# EAGLE board SchematSterownika (EAGLE 6.1)

Size 149.84 x 138.1 mm. Coordinates in mm from the lower left corner, seen from the top.
Outline: 0,0 149.84,0 149.84,138.1 0,138.1 0,0
Copper layers (1*16): Top 0.035mm / dielectric 1.5mm / Bottom 0.035mm
Design rules: minimum track width 14mil, minimum drill 24mil, track to track 8mil, track to pad 8mil, pad to pad 8mil, via to via 8mil, smd to smd 8mil, copper to edge 40mil, drill to drill 8mil, minimum pad ring 10mil, minimum via ring 8mil, stop-mask expansion 4mil, vias tented up to drill 0mil, thermal gap 10mil

## Footprints (pad centres in the part's own frame; a part is rotated, then mirrored left to right if it is on the bottom)
C050-050X075 = drill 0.813 octagon: 1 -2.54,0; 2 2.54,0
TUXGR_16X2_R2 = drill 1 pad 1.676: 1 -32,15.5; 2 -29.46,15.5; 3 -26.92,15.5; 4 -24.38,15.5; 5 -21.84,15.5; 6 -19.3,15.5; 7 -16.76,15.5; 8 -14.22,15.5; 9 -11.68,15.5; 10 -9.14,15.5; 11 -6.6,15.5; 12 -4.06,15.5; 13 -1.52,15.5; 14 1.02,15.5; 15 3.56,15.5; 16 6.1,15.5 | hole 2.5: -37.5,-15.5; 37.5,-15.5; -37.5,15.5; 37.5,15.5
DIL40 = drill 0.813 long: 1 -24.13,-7.62; 2 -21.59,-7.62; 3 -19.05,-7.62; 4 -16.51,-7.62; 5 -13.97,-7.62; 6 -11.43,-7.62; 7 -8.89,-7.62; 8 -6.35,-7.62; 9 -3.81,-7.62; 10 -1.27,-7.62; 11 1.27,-7.62; 12 3.81,-7.62; 13 6.35,-7.62; 14 8.89,-7.62; 15 11.43,-7.62; 16 13.97,-7.62; 17 16.51,-7.62; 18 19.05,-7.62; 19 21.59,-7.62; 20 24.13,-7.62; 21 24.13,7.62; 22 21.59,7.62; 23 19.05,7.62; 24 16.51,7.62; 25 13.97,7.62; 26 11.43,7.62; 27 8.89,7.62; 28 6.35,7.62; 29 3.81,7.62; 30 1.27,7.62; 31 -1.27,7.62; 32 -3.81,7.62; 33 -6.35,7.62; 34 -8.89,7.62; 35 -11.43,7.62; 36 -13.97,7.62; 37 -16.51,7.62; 38 -19.05,7.62; 39 -21.59,7.62; 40 -24.13,7.62
DIL16 = drill 0.813 long: 1 -8.89,-3.81; 2 -6.35,-3.81; 3 -3.81,-3.81; 4 -1.27,-3.81; 5 1.27,-3.81; 6 3.81,-3.81; 7 6.35,-3.81; 8 8.89,-3.81; 9 8.89,3.81; 10 6.35,3.81; 11 3.81,3.81; 12 1.27,3.81; 13 -1.27,3.81; 14 -3.81,3.81; 15 -6.35,3.81; 16 -8.89,3.81
78XXS = drill 1.016 long: GND 0,-2.54; IN -2.54,-2.54; OUT 2.54,-2.54
ML10 = drill 0.914 octagon: 1 -5.08,-1.27; 2 -5.08,1.27; 3 -2.54,-1.27; 4 -2.54,1.27; 5 0,-1.27; 6 0,1.27; 7 2.54,-1.27; 8 2.54,1.27; 9 5.08,-1.27; 10 5.08,1.27
1X02 = drill 1.016 long: 1 -1.27,0; 2 1.27,0
B3F-40XX = drill 1.194 long: 1 -6.248,2.489; 2 6.248,2.489; 3 -6.248,-2.489; 4 6.248,-2.489 | hole 1.803: 0,-4.496; 0,4.496
CA9V = drill 1.321 long: A -2.54,-5.08; E 2.54,-5.08; S 0,5.08
0309/12 = drill 0.813 octagon: 1 -6.35,0; 2 6.35,0
F09HP = drill 1.016 octagon: 1 -5.486,-1.27; 2 -2.743,-1.27; 3 0,-1.27; 4 2.743,-1.27; 5 5.486,-1.27; 6 -4.115,1.27; 7 -1.372,1.27; 8 1.372,1.27; 9 4.115,1.27 | drill 3.302 pad 5.08: G1 -12.522,0; G2 12.522,0
AK500/2-H = drill 1.321 long: 1 -2.515,0; 2 2.515,0

## Placement (x,y rotation side)
C1  10uF  [C050-050X075]  90.17,95.25 0 top
C2  10uF  [C050-050X075]  100.33,95.25 0 top
C3  10uF  [C050-050X075]  110.49,95.25 0 top
C4  10uF  [C050-050X075]  90.17,83.82 0 top
C5  10uF  [C050-050X075]  100.33,83.82 0 top
C6  10uF  [C050-050X075]  110.49,83.82 0 top
DIS1  TUXGR_16X2_R2  [TUXGR_16X2_R2]  43.18,116.84 0 top
IC1  MEGA32-P  [DIL40]  38.1,86.36 0 top
IC2  MAX232  [DIL16]  124.46,88.9 270 top
IC3  [78XXS]  104.14,116.84 180 top
ISP  [ML10]  101.6,132.08 0 top
LCD_L+  JMP_LCD_1  [1X02]  138.43,119.38 0 top
LCD_L-  JMP_LCD_2  [1X02]  138.43,111.76 0 top
PA0  [B3F-40XX]  10.16,58.42 0 top
PA1  [B3F-40XX]  27.94,58.42 0 top
PA2  [B3F-40XX]  45.72,58.42 0 top
PA3  [B3F-40XX]  10.16,43.18 0 top
PA4  [B3F-40XX]  27.94,43.18 0 top
PA5  [B3F-40XX]  45.72,43.18 0 top
PA6  [B3F-40XX]  10.16,27.94 0 top
PA7  [B3F-40XX]  27.94,27.94 0 top
PB0  [B3F-40XX]  45.72,27.94 0 top
PB1  [B3F-40XX]  27.94,12.7 0 top
PB2  [B3F-40XX]  86.36,58.42 0 top
PB3  [B3F-40XX]  104.14,58.42 0 top
PB4  [B3F-40XX]  121.92,58.42 0 top
PB5  [B3F-40XX]  139.7,58.42 0 top
PB6  [B3F-40XX]  86.36,43.18 0 top
PB7  [B3F-40XX]  104.14,43.18 0 top
R1  [CA9V]  90.17,113.03 0 top
R3  10  [0309/12]  6.35,90.17 90 top
RS232  [F09HP]  138.43,86.36 270 top
S17  [B3F-40XX]  121.92,43.18 0 top
S18  [B3F-40XX]  139.7,43.18 0 top
S19  [B3F-40XX]  86.36,27.94 0 top
S20  [B3F-40XX]  104.14,27.94 0 top
S21  [B3F-40XX]  121.92,27.94 0 top
S22  [B3F-40XX]  139.7,27.94 0 top
S23  [B3F-40XX]  104.14,12.7 0 top
S24  [B3F-40XX]  121.92,12.7 0 top
SUPPLY1  SUPPLY 5V  [1X02]  118.11,119.38 0 top
SUPPLY2  SUPPLY 5V  [1X02]  128.27,119.38 0 top
SUPPLY3  SUPPLY 5V  [1X02]  118.11,111.76 0 top
SUPPLY4  SUPPLY 5V  [1X02]  128.27,111.76 0 top
SUPPLY_CON  [AK500/2-H]  133.35,133.35 0 top
SUPPLY_CON9V  [AK500/2-H]  119.38,133.35 0 top

## Library data of the parts
C1-C6 R3 = resistor
DIS1 = display-lcd; OC_FARNELL: unknown; OC_NEWARK: unknown
IC1 = atmel; MPN: ATMEGA32-16PU; OC_FARNELL: 1661729; OC_NEWARK: 51P1794
IC2 = maxim; MF: MAXIM; MPN: MAX232ACPE+; OC_FARNELL: 9723773; OC_NEWARK: 68K4544
IC3 = v-reg
ISP = con-ml; OC_FARNELL: unknown; OC_NEWARK: unknown
LCD_L+ LCD_L- SUPPLY1-SUPPLY4 = pinhead
PA0 PA1-PA7 PB0 PB1-PB7 S17-S24 = switch-omron; MF: OMRON COMPONENTS USA; MPN: B3F-4000; OC_FARNELL: 176434; OC_NEWARK: 36K3105
R1 = pot
RS232 = con-subd; OC_FARNELL: unknown; OC_NEWARK: unknown
SUPPLY_CON SUPPLY_CON9V = con-ptr500; OC_FARNELL: unknown; OC_NEWARK: unknown

## Nets
+5V: C3.2 C5.1 DIS1.2 IC2.16 IC3.OUT ISP.2 LCD_L+.2 R1.E SUPPLY1.1 SUPPLY2.1 SUPPLY3.1 SUPPLY4.1 SUPPLY_CON.1
+12V: C6.1 IC3.IN SUPPLY_CON9V.1
/+5V: IC1.10
/E: DIS1.6 IC1.17
/GND: IC1.11 IC1.31 IC2.15
/RESET: IC1.9 ISP.5
/RS: DIS1.4 IC1.16
AVCC: IC1.30
D4: DIS1.11 IC1.18
D5: DIS1.12 IC1.19
D6: DIS1.13 IC1.20
D7: DIS1.14 IC1.21
GND: C2.1 C5.2 C6.2 DIS1.1 DIS1.5 DIS1.7 DIS1.8 DIS1.9 DIS1.10 IC3.GND ISP.4 ISP.6 ISP.8 ISP.10 LCD_L-.2 PA0.3 PA1.3 PA2.3 PA3.3 PA4.3 PA5.3 PA6.3 PA7.3 PB0.3 PB1.3 PB2.3 PB3.3 PB4.3 PB5.3 PB6.3 PB7.3 R1.A RS232.5 S17.3 S18.3 S19.3 S20.3 S21.3 S22.3 S23.3 S24.3 SUPPLY1.2 SUPPLY2.2 SUPPLY3.2 SUPPLY4.2 SUPPLY_CON9V.2 SUPPLY_CON.2
N$1: IC2.13 RS232.3
N$2: RS232.4 RS232.6
N$3: RS232.7 RS232.8
N$4: IC2.14 RS232.2
N$5: C2.2 IC2.6
N$6: C3.1 IC2.2
N$7: C1.1 IC2.1
N$8: C1.2 IC2.3
N$9: C4.1 IC2.4
N$10: C4.2 IC2.5
N$11: IC1.14 IC2.12
N$12: IC1.15 IC2.11
N$13: DIS1.3 R1.S
N$16: DIS1.16 R3.2
N$17: DIS1.15 LCD_L+.1
N$18: LCD_L-.1 R3.1
PA0: IC1.40 PA0.2
PA1: IC1.39 PA1.2
PA2: IC1.38 PA2.2
PA3: IC1.37 PA3.2
PA4: IC1.36 PA4.2
PA5: IC1.35 PA5.2
PA6: IC1.34 PA6.2
PA7: IC1.33 PA7.1
PB0: IC1.1 PB0.1
PB1: IC1.2 PB1.1
PB2: IC1.3 PB2.1
PB3: IC1.4 PB3.1
PB4: IC1.5 PB4.1
PB5: IC1.6 ISP.1 PB5.1
PB6: IC1.7 ISP.9 PB6.1
PB7: IC1.8 ISP.7 PB7.1
PC0: IC1.22 S17.1
PC1: IC1.23 S18.1
PC2: IC1.24 S19.1
PC3: IC1.25 S20.1
PC4: IC1.26 S21.1
PC5: IC1.27 S22.1
PC6: IC1.28 S23.1
PC7: IC1.29 S24.1

## Tracks (layer width: path | path; a pad name or v marks a point on that pad's centre or on a via)
+5V  (12 unrouted)
+12V  (2 unrouted)
/E  (1 unrouted)
/GND  (2 unrouted)
/RESET  (1 unrouted)
/RS  (1 unrouted)
D4  (1 unrouted)
D5  (1 unrouted)
D6  (1 unrouted)
D7  (1 unrouted)
GND  (46 unrouted)
N$1  (1 unrouted)
N$2  (1 unrouted)
N$3  (1 unrouted)
N$4  (1 unrouted)
N$5  (1 unrouted)
N$6  (1 unrouted)
N$7  (1 unrouted)
N$8  (1 unrouted)
N$9  (1 unrouted)
N$10  (1 unrouted)
N$11  (1 unrouted)
N$12  (1 unrouted)
N$13  (1 unrouted)
N$16  (1 unrouted)
N$17  (1 unrouted)
N$18  (1 unrouted)
PA0  (1 unrouted)
PA1  (1 unrouted)
PA2  (1 unrouted)
PA3  (1 unrouted)
PA4  (1 unrouted)
PA5  (1 unrouted)
PA6  (1 unrouted)
PA7  (1 unrouted)
PB0  (1 unrouted)
PB1  (1 unrouted)
PB2  (1 unrouted)
PB3  (1 unrouted)
PB4  (1 unrouted)
PB5  (2 unrouted)
PB6  (2 unrouted)
PB7  (2 unrouted)
PC0  (1 unrouted)
PC1  (1 unrouted)
PC2  (1 unrouted)
PC3  (1 unrouted)
PC4  (1 unrouted)
PC5  (1 unrouted)
PC6  (1 unrouted)
PC7  (1 unrouted)